# EAGLE board SparkFun GPS NEO_M9N_ANT-Panel (EAGLE 9.5.1), part 1 of 3
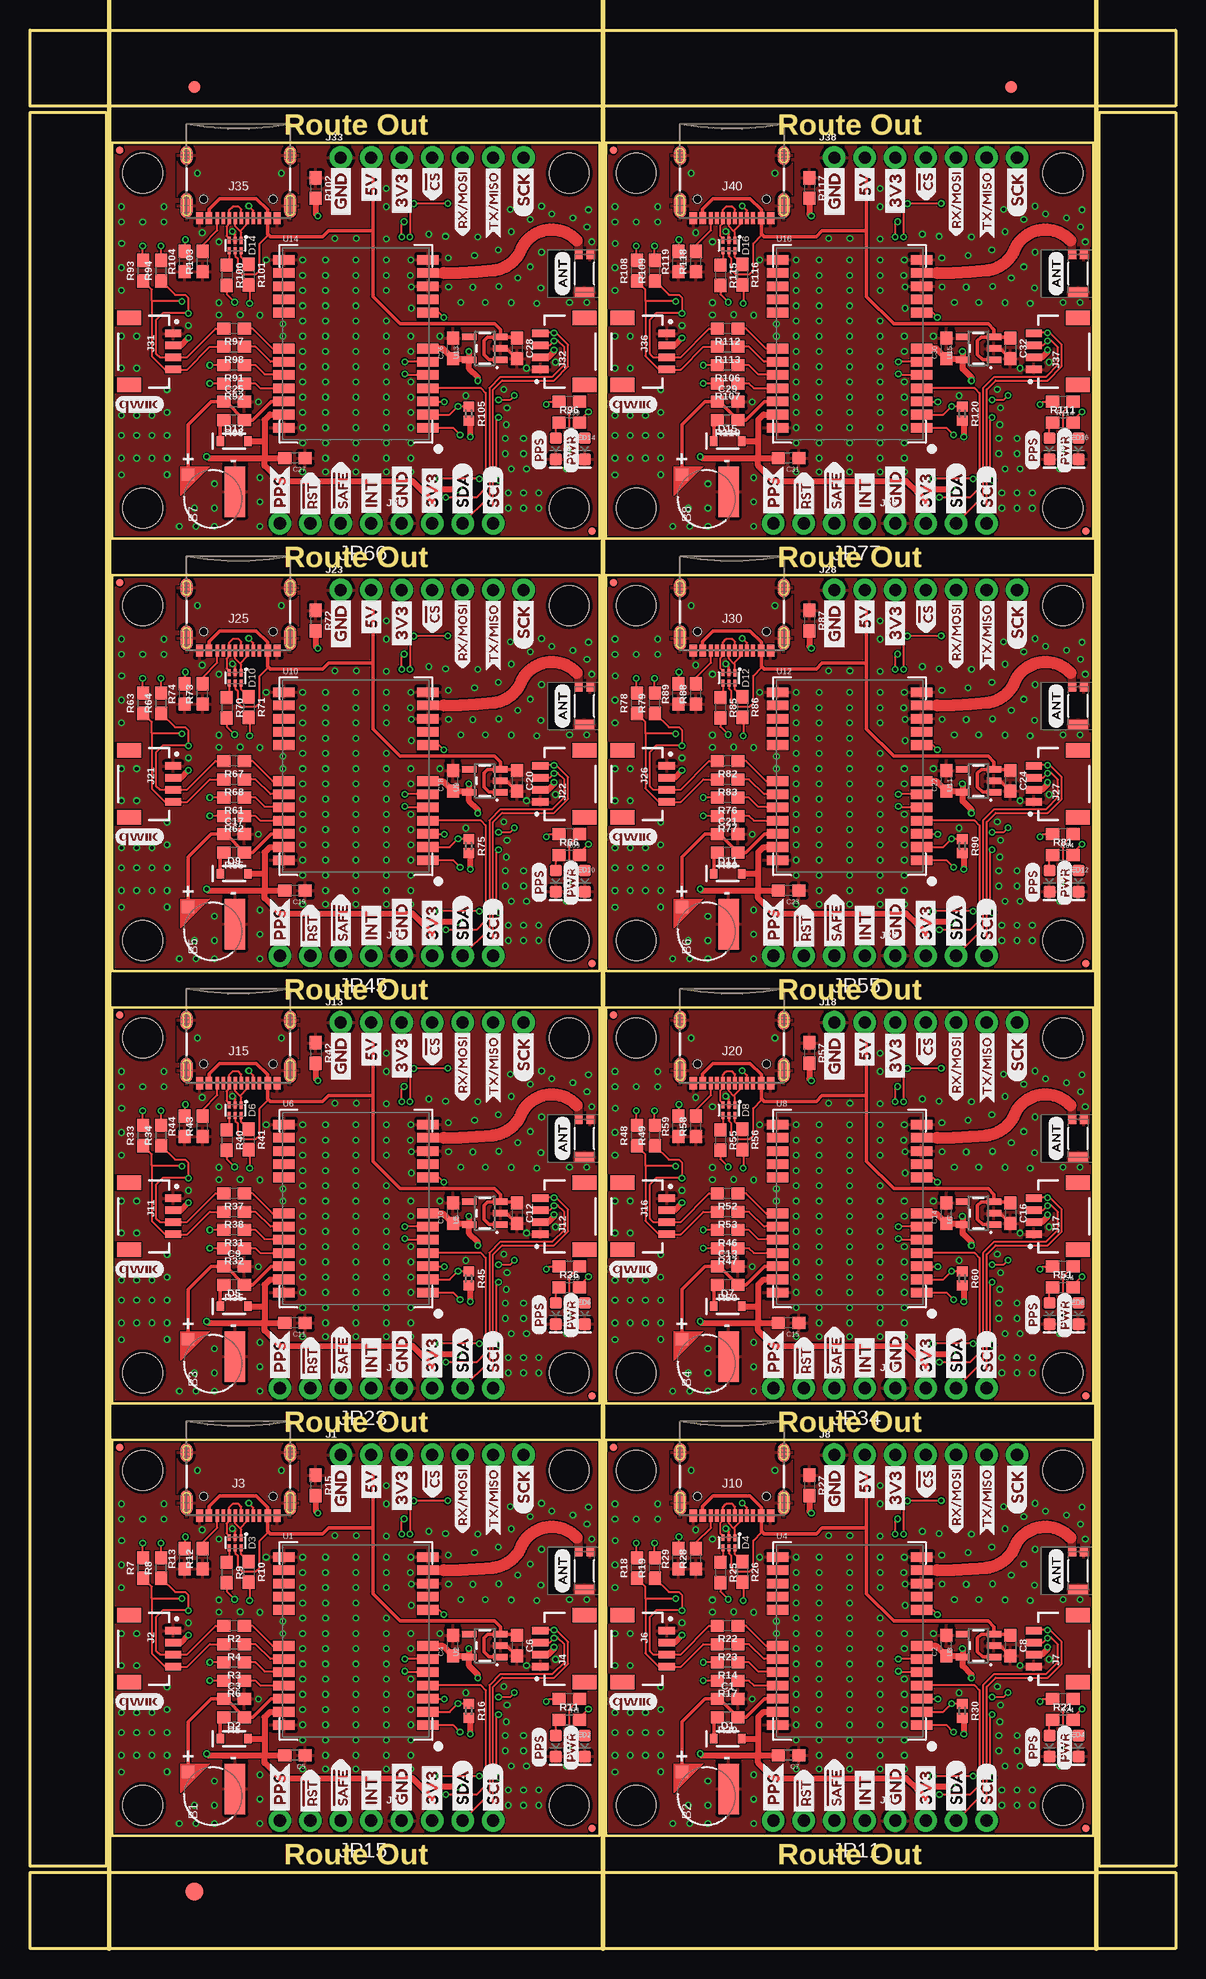
[diagram p0: board, top side]
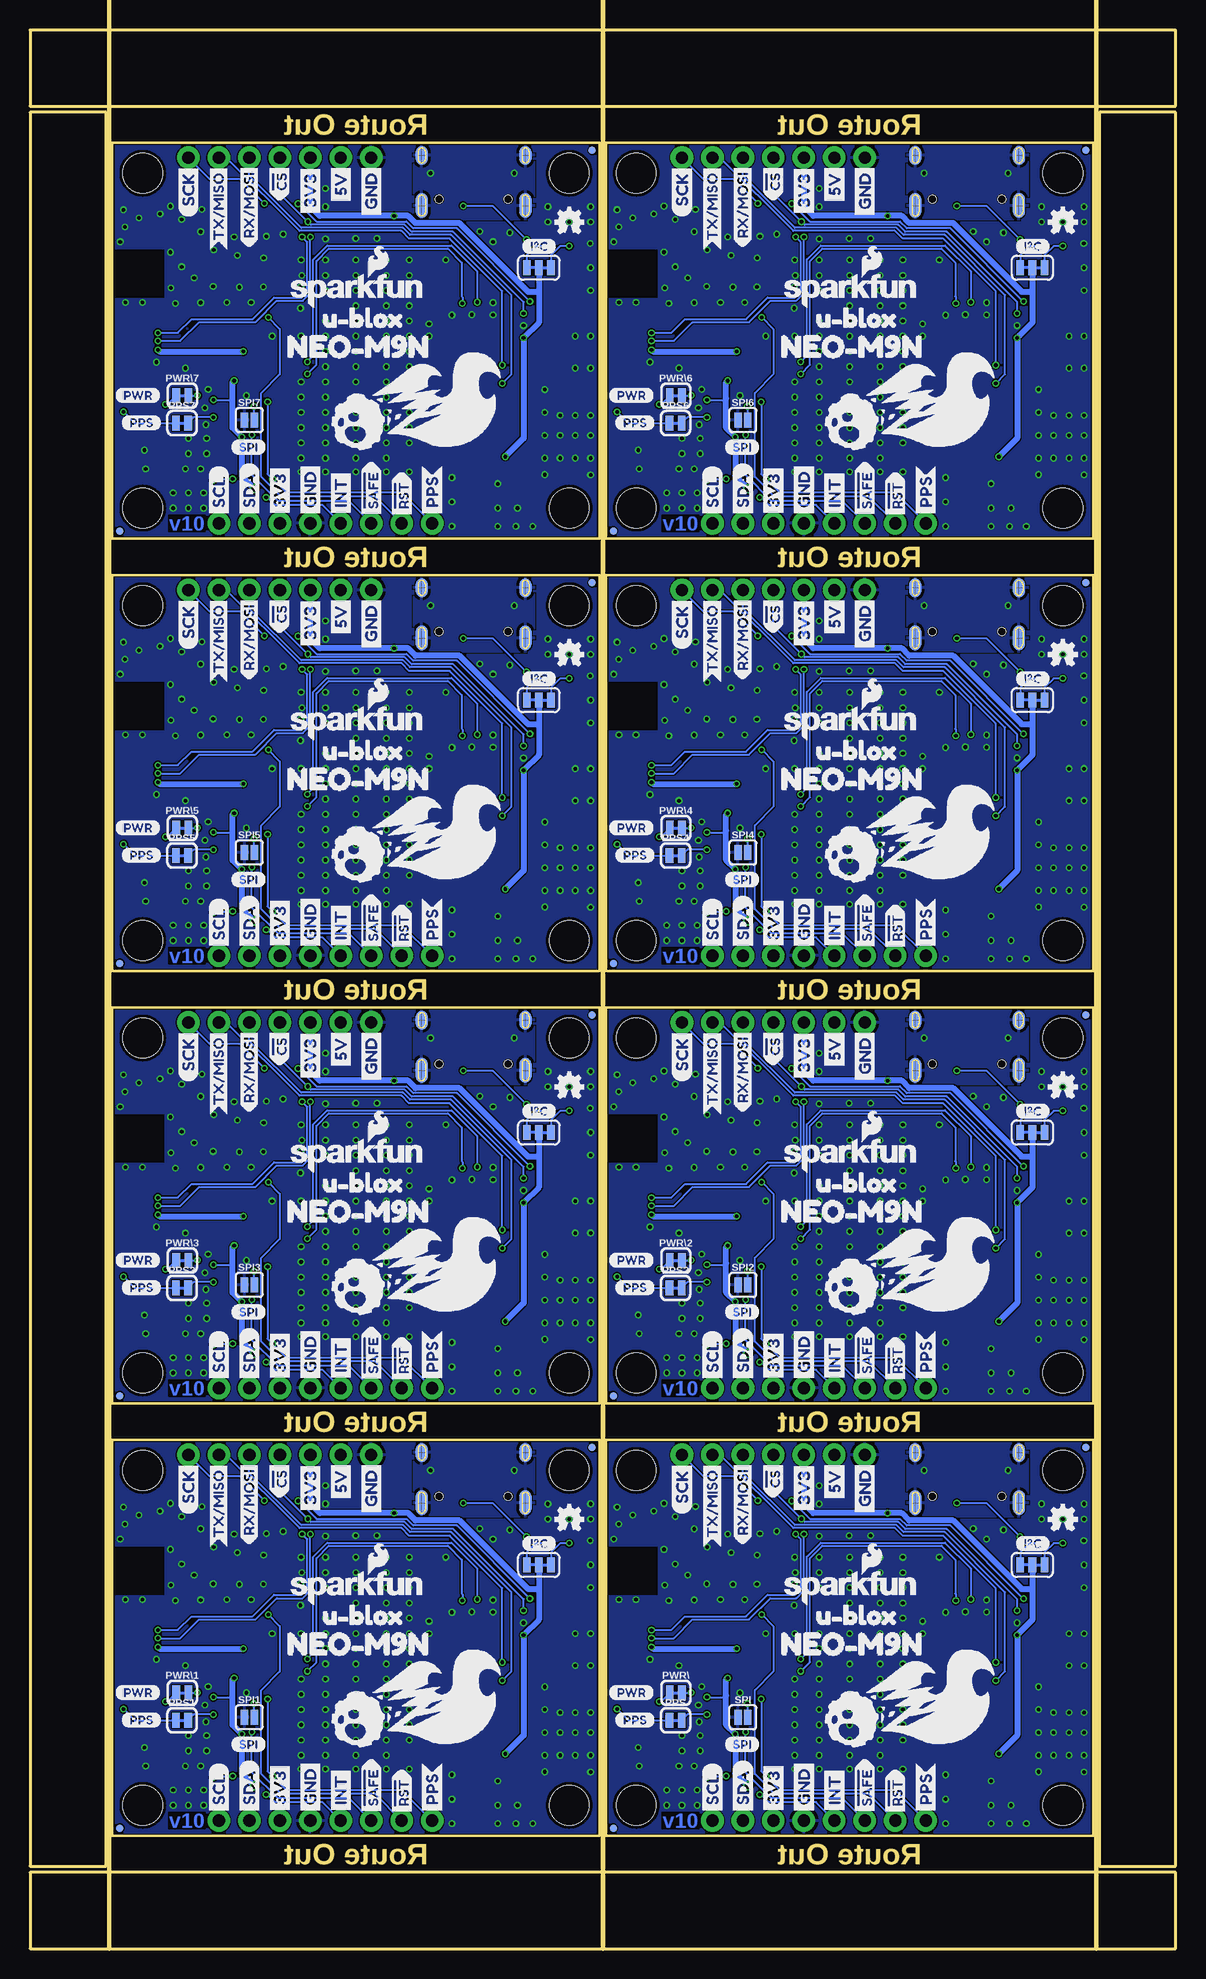
[diagram p1: board, bottom side, seen from below]

Size 95.5 x 159.92 mm. Coordinates in mm from the lower left corner, seen from the top.
Outline: 6.86,9.4 6.86,42.39 47.5,42.39 47.5,9.4 6.86,9.4
Outline: 48.01,9.4 48.01,42.39 88.65,42.39 88.65,9.4 48.01,9.4
Outline: 6.86,45.44 6.86,78.44 47.5,78.44 47.5,45.44 6.86,45.44
Outline: 48.01,45.44 48.01,78.44 88.65,78.44 88.65,45.44 48.01,45.44
Outline: 6.86,81.48 6.86,114.48 47.5,114.48 47.5,81.48 6.86,81.48
Outline: 48.01,81.48 48.01,114.48 88.65,114.48 88.65,81.48 48.01,81.48
Outline: 6.86,117.53 6.86,150.52 47.5,150.52 47.5,117.53 6.86,117.53
Outline: 48.01,117.53 48.01,150.52 88.65,150.52 88.65,117.53 48.01,117.53
Outline: 0,6.35 95.5,6.35 95.5,0 0,0 0,6.35
Outline: 89.15,153.06 95.5,153.06 95.5,6.86 89.15,6.86 89.15,153.06
Outline: 0,159.92 95.5,159.92 95.5,153.57 0,153.57 0,159.92
Outline: 0,153.06 6.35,153.06 6.35,6.86 0,6.86 0,153.06
Copper layers (1*16): Top 0.035mm / dielectric 1.5mm / Bottom 0.035mm
Design rules "SparkFun-2-layer-FAB-LIMIT": minimum track width 4mil, minimum drill 6mil, track to track 4mil, track to pad 4mil, pad to pad 4mil, via to via 4mil, smd to smd 4mil, copper to edge 4mil, drill to drill 4mil, minimum pad ring 5mil, minimum via ring 5mil, stop-mask expansion 4mil, vias tented up to drill 25mil, thermal gap 10mil
Net classes: 2 3.3V: width 0.508 mm; 3 Antenna: width 1 mm, clearance 0.3 mm
Milling: 3 lines

## Footprints (pad centres in the part's own frame; a part is rotated, then mirrored left to right if it is on the bottom)
ML414H_IV01E = smd 1 x 1: + 2.022,2.032 | smd 4.2 x 1.7: - 0.6,-1.85
0603 = smd 1.1 x 1: 1 -0.85,0; 2 0.85,0
SOD-323 = smd 0.63 x 0.83: A 1.15,0; C -1.15,0
SOT886 = smd 0.61 x 0.25: 1 -0.405,0.5 | smd 0.56 x 0.25: 2 -0.43,0; 3 -0.43,-0.5; 4 0.43,-0.5; 5 0.43,0; 6 0.43,0.5
FIDUCIAL-1X2 = smd 1 x 1: 1 0,0
FIDUCIAL-1.5X3 = smd 1.5 x 1.5: 1 0,0
1X07_NO_SILK = drill 1.016 pad 1.88: 1 0,0; 2 2.54,0; 3 5.08,0; 4 7.62,0; 5 10.16,0; 6 12.7,0; 7 15.24,0
JST04_1MM_RA = smd 0.6 x 1.35: 1 -1.5,0; 2 -0.5,0; 3 0.5,0; 4 1.5,0 | smd 1.2 x 2: NC1 2.8,-3.675; NC2 -2.8,-3.675
USB-C-16P = smd 0.3 x 1.016: A5 -1.25,0.154; A6 -0.25,0.154; A7 0.25,0.154; A8 1.25,0.154; B5 1.75,0.154; B6 0.75,0.154; B7 -0.75,0.154; B8 -1.75,0.154 | smd 0.6 x 1.016: GND -3.225,0.154; GND2 3.225,0.154 | smd 1 x 2.1: SHLD1 -4.32,-0.915; SHLD2 4.32,-0.915 | smd 1 x 2.1 bottom: SHLD3 -4.32,-0.915; SHLD4 4.32,-0.915 | smd 1 x 1.6: SHLD5 -4.32,-5.095; SHLD8 4.32,-5.095 | smd 1 x 1.6 bottom: SHLD6 -4.32,-5.095; SHLD7 4.32,-5.095 | smd 0.55 x 1.016: VBUS1 -2.45,0.154; VBUS2 2.45,0.154 | hole 0.65: -2.89,-1.445; 2.89,-1.445
1X04_NO_SILK = drill 1.016 pad 1.88: 1 0,0; 2 2.54,0; 3 5.08,0; 4 7.62,0
STAND-OFF = hole 3.302: 0,0
MICRO-FIDUCIAL = smd 0.635 x 0.635: 1 0,0
SMT-JUMPER_3_2-NC_TRACE_SILK = smd 0.635 x 1.27: 1 -1.016,0; 2 0,0; 3 1.016,0
LED-0603 = smd 1 x 1: A -0.877,0; C 0.877,0
SMT-JUMPER_2_NC_TRACE_SILK = smd 0.635 x 1.27: 1 -0.508,0; 2 0.508,0
0402 = smd 0.85 x 0.9: 1 -0.58,0; 2 0.58,0
SMT-JUMPER_2_NO_SILK = smd 0.635 x 1.27: 1 -0.406,0; 2 0.406,0
NEO-M9N = smd 1.8 x 0.8: 1 6,-7; 2 6,-5.9; 3 6,-4.8; 4 6,-3.7; 5 6,-2.6; 6 6,-1.5; 7 6,-0.4; 8 6,2.6; 9 6,3.7; 10 6,4.8; 11 6,5.9; 12 6,7; 13 -6,7; 14 -6,5.9; 15 -6,4.8; 16 -6,3.7; 17 -6,2.6; 18 -6,-0.4; 19 -6,-1.5; 20 -6,-2.6; 21 -6,-3.7; 22 -6,-4.8; 23 -6,-5.9; 24 -6,-7
SOT23-5 = smd 0.55 x 1.2: 1 -0.95,-1.3; 2 0,-1.3; 3 0.95,-1.3; 4 0.95,1.3; 5 -0.95,1.3
W3011 = smd 0.8 x 0.65: 1 1.6,0.475; 2 1.6,-0.475 | smd 0.8 x 1.6: 3 -1.6,0

## Placement (x,y rotation side)
B1  6.8MM_COIN_CELL  [ML414H_IV01E]  15.24,12.7 90 top
B2  6.8MM_COIN_CELL  [ML414H_IV01E]  56.39,12.7 90 top
B3  6.8MM_COIN_CELL  [ML414H_IV01E]  15.24,48.74 90 top
B4  6.8MM_COIN_CELL  [ML414H_IV01E]  56.39,48.74 90 top
B5  6.8MM_COIN_CELL  [ML414H_IV01E]  15.24,84.79 90 top
B6  6.8MM_COIN_CELL  [ML414H_IV01E]  56.39,84.79 90 top
B7  6.8MM_COIN_CELL  [ML414H_IV01E]  15.24,120.83 90 top
B8  6.8MM_COIN_CELL  [ML414H_IV01E]  56.39,120.83 90 top
C1  1.0uF  [0603]  58.17,20.8 0 top
C2  1.0uF  [0603]  76.4,25.25 90 top
C3  1.0uF  [0603]  17.02,20.8 0 top
C4  1.0uF  [0603]  35.26,25.25 90 top
C5  0.1uF  [0603]  22.1,16.1 180 top
C6  1.0uF  [0603]  40.59,25.25 270 top
C7  0.1uF  [0603]  63.25,16.1 180 top
C8  1.0uF  [0603]  81.74,25.25 270 top
C9  1.0uF  [0603]  17.02,56.85 0 top
C10  1.0uF  [0603]  35.26,61.29 90 top
C11  0.1uF  [0603]  22.1,52.15 180 top
C12  1.0uF  [0603]  40.59,61.29 270 top
C13  1.0uF  [0603]  58.17,56.85 0 top
C14  1.0uF  [0603]  76.4,61.29 90 top
C15  0.1uF  [0603]  63.25,52.15 180 top
C16  1.0uF  [0603]  81.74,61.29 270 top
C17  1.0uF  [0603]  17.02,92.89 0 top
C18  1.0uF  [0603]  35.26,97.33 90 top
C19  0.1uF  [0603]  22.1,88.19 180 top
C20  1.0uF  [0603]  40.59,97.33 270 top
C21  1.0uF  [0603]  58.17,92.89 0 top
C22  1.0uF  [0603]  76.4,97.33 90 top
C23  0.1uF  [0603]  63.25,88.19 180 top
C24  1.0uF  [0603]  81.74,97.33 270 top
C25  1.0uF  [0603]  17.02,128.93 0 top
C26  1.0uF  [0603]  35.26,133.38 90 top
C27  0.1uF  [0603]  22.1,124.23 180 top
C28  1.0uF  [0603]  40.59,133.38 270 top
C29  1.0uF  [0603]  58.17,128.93 0 top
C30  1.0uF  [0603]  76.4,133.38 90 top
C31  0.1uF  [0603]  63.25,124.23 180 top
C32  1.0uF  [0603]  81.74,133.38 270 top
D1  0.5A/40V/420mV  [SOD-323]  58.17,17.5 0 top
D2  0.5A/40V/420mV  [SOD-323]  17.02,17.5 0 top
D3  PRTR5V0U2F  [SOT886]  17.12,33.83 270 top
D4  PRTR5V0U2F  [SOT886]  58.27,33.83 270 top
D5  0.5A/40V/420mV  [SOD-323]  17.02,53.54 0 top
D6  PRTR5V0U2F  [SOT886]  17.12,69.88 270 top
D7  0.5A/40V/420mV  [SOD-323]  58.17,53.54 0 top
D8  PRTR5V0U2F  [SOT886]  58.27,69.88 270 top
D9  0.5A/40V/420mV  [SOD-323]  17.02,89.59 0 top
D10  PRTR5V0U2F  [SOT886]  17.12,105.92 270 top
D11  0.5A/40V/420mV  [SOD-323]  58.17,89.59 0 top
D12  PRTR5V0U2F  [SOT886]  58.27,105.92 270 top
D13  0.5A/40V/420mV  [SOD-323]  17.02,125.63 0 top
D14  PRTR5V0U2F  [SOT886]  17.12,141.96 270 top
D15  0.5A/40V/420mV  [SOD-323]  58.17,125.63 0 top
D16  PRTR5V0U2F  [SOT886]  58.27,141.96 270 top
E$1  [FIDUCIAL-1X2]  13.72,155.16 0 top
E$2  [FIDUCIAL-1X2]  81.79,155.16 0 top
E$3  [FIDUCIAL-1.5X3]  13.72,4.76 0 top
J1  [1X07_NO_SILK]  25.91,41.15 0 top
J2  Qwiic Right Angle  [JST04_1MM_RA]  11.94,24.99 270 top
J3  [USB-C-16P]  17.37,36.25 180 top
J4  Qwiic Right Angle  [JST04_1MM_RA]  42.54,24.99 90 top
J5  [1X04_NO_SILK]  30.99,10.67 0 top
J6  Qwiic Right Angle  [JST04_1MM_RA]  53.09,24.99 270 top
J7  Qwiic Right Angle  [JST04_1MM_RA]  83.69,24.99 90 top
J8  [1X07_NO_SILK]  67.06,41.15 0 top
J9  [1X04_NO_SILK]  72.14,10.67 0 top
J10  [USB-C-16P]  58.52,36.25 180 top
J11  Qwiic Right Angle  [JST04_1MM_RA]  11.94,61.04 270 top
J12  Qwiic Right Angle  [JST04_1MM_RA]  42.54,61.04 90 top
J13  [1X07_NO_SILK]  25.91,77.19 0 top
J14  [1X04_NO_SILK]  30.99,46.71 0 top
J15  [USB-C-16P]  17.37,72.29 180 top
J16  Qwiic Right Angle  [JST04_1MM_RA]  53.09,61.04 270 top
J17  Qwiic Right Angle  [JST04_1MM_RA]  83.69,61.04 90 top
J18  [1X07_NO_SILK]  67.06,77.19 0 top
J19  [1X04_NO_SILK]  72.14,46.71 0 top
J20  [USB-C-16P]  58.52,72.29 180 top
J21  Qwiic Right Angle  [JST04_1MM_RA]  11.94,97.08 270 top
J22  Qwiic Right Angle  [JST04_1MM_RA]  42.54,97.08 90 top
J23  [1X07_NO_SILK]  25.91,113.23 0 top
J24  [1X04_NO_SILK]  30.99,82.75 0 top
J25  [USB-C-16P]  17.37,108.33 180 top
J26  Qwiic Right Angle  [JST04_1MM_RA]  53.09,97.08 270 top
J27  Qwiic Right Angle  [JST04_1MM_RA]  83.69,97.08 90 top
J28  [1X07_NO_SILK]  67.06,113.23 0 top
J29  [1X04_NO_SILK]  72.14,82.75 0 top
J30  [USB-C-16P]  58.52,108.33 180 top
J31  Qwiic Right Angle  [JST04_1MM_RA]  11.94,133.12 270 top
J32  Qwiic Right Angle  [JST04_1MM_RA]  42.54,133.12 90 top
J33  [1X07_NO_SILK]  25.91,149.28 0 top
J34  [1X04_NO_SILK]  30.99,118.8 0 top
J35  [USB-C-16P]  17.37,144.37 180 top
J36  Qwiic Right Angle  [JST04_1MM_RA]  53.09,133.12 270 top
J37  Qwiic Right Angle  [JST04_1MM_RA]  83.69,133.12 90 top
J38  [1X07_NO_SILK]  67.06,149.28 0 top
J39  [1X04_NO_SILK]  72.14,118.8 0 top
J40  [USB-C-16P]  58.52,144.37 180 top
JP1  STAND-OFF  [STAND-OFF]  50.55,39.85 0 top
JP2  STAND-OFF  [STAND-OFF]  86.11,39.85 0 top
JP3  FIDUCIALUFIDUCIAL  [MICRO-FIDUCIAL]  88.01,10.03 0 top
JP4  FIDUCIALUFIDUCIAL  [MICRO-FIDUCIAL]  48.64,41.76 0 top
JP5  JUMPER-SMT_3_2-NC_TRACE_SILK  [SMT-JUMPER_3_2-NC_TRACE_SILK]  11.94,31.98 0 bottom
JP6  JUMPER-SMT_3_2-NC_TRACE_SILK  [SMT-JUMPER_3_2-NC_TRACE_SILK]  53.09,31.98 0 bottom
JP7  FIDUCIALUFIDUCIAL  [MICRO-FIDUCIAL]  88.01,10.03 0 bottom
JP8  FIDUCIALUFIDUCIAL  [MICRO-FIDUCIAL]  48.64,41.76 0 bottom
JP9  STAND-OFF  [STAND-OFF]  50.55,11.94 0 top
JP10  STAND-OFF  [STAND-OFF]  86.11,11.94 0 top
JP11  [1X04_NO_SILK]  69.6,10.67 180 top
JP12  STAND-OFF  [STAND-OFF]  9.4,75.9 0 top
JP13  STAND-OFF  [STAND-OFF]  44.96,75.9 0 top
JP14  FIDUCIALUFIDUCIAL  [MICRO-FIDUCIAL]  46.86,46.08 0 top
JP15  [1X04_NO_SILK]  28.45,10.67 180 top
JP16  FIDUCIALUFIDUCIAL  [MICRO-FIDUCIAL]  7.49,77.8 0 top
JP17  JUMPER-SMT_3_2-NC_TRACE_SILK  [SMT-JUMPER_3_2-NC_TRACE_SILK]  11.94,68.02 0 bottom
JP18  FIDUCIALUFIDUCIAL  [MICRO-FIDUCIAL]  46.86,46.08 0 bottom
JP19  FIDUCIALUFIDUCIAL  [MICRO-FIDUCIAL]  7.49,77.8 0 bottom
JP20  STAND-OFF  [STAND-OFF]  9.4,47.98 0 top
JP21  FIDUCIALUFIDUCIAL  [MICRO-FIDUCIAL]  46.86,10.03 0 top
JP22  STAND-OFF  [STAND-OFF]  44.96,47.98 0 top
JP23  [1X04_NO_SILK]  28.45,46.71 180 top
JP24  STAND-OFF  [STAND-OFF]  50.55,75.9 0 top
JP25  STAND-OFF  [STAND-OFF]  86.11,75.9 0 top
JP26  FIDUCIALUFIDUCIAL  [MICRO-FIDUCIAL]  88.01,46.08 0 top
JP27  FIDUCIALUFIDUCIAL  [MICRO-FIDUCIAL]  48.64,77.8 0 top
JP28  JUMPER-SMT_3_2-NC_TRACE_SILK  [SMT-JUMPER_3_2-NC_TRACE_SILK]  53.09,68.02 0 bottom
JP29  FIDUCIALUFIDUCIAL  [MICRO-FIDUCIAL]  88.01,46.08 0 bottom
JP30  FIDUCIALUFIDUCIAL  [MICRO-FIDUCIAL]  48.64,77.8 0 bottom
JP31  STAND-OFF  [STAND-OFF]  9.4,39.85 0 top
JP32  STAND-OFF  [STAND-OFF]  50.55,47.98 0 top
JP33  STAND-OFF  [STAND-OFF]  86.11,47.98 0 top
JP34  [1X04_NO_SILK]  69.6,46.71 180 top
JP35  STAND-OFF  [STAND-OFF]  9.4,111.94 0 top
JP36  STAND-OFF  [STAND-OFF]  44.96,111.94 0 top
JP37  FIDUCIALUFIDUCIAL  [MICRO-FIDUCIAL]  46.86,82.12 0 top
JP38  FIDUCIALUFIDUCIAL  [MICRO-FIDUCIAL]  7.49,113.84 0 top
JP39  JUMPER-SMT_3_2-NC_TRACE_SILK  [SMT-JUMPER_3_2-NC_TRACE_SILK]  11.94,104.06 0 bottom
JP40  FIDUCIALUFIDUCIAL  [MICRO-FIDUCIAL]  46.86,82.12 0 bottom
JP41  STAND-OFF  [STAND-OFF]  44.96,39.85 0 top
JP42  FIDUCIALUFIDUCIAL  [MICRO-FIDUCIAL]  7.49,113.84 0 bottom
JP43  STAND-OFF  [STAND-OFF]  9.4,84.02 0 top
JP44  STAND-OFF  [STAND-OFF]  44.96,84.02 0 top
JP45  [1X04_NO_SILK]  28.45,82.75 180 top
JP46  STAND-OFF  [STAND-OFF]  50.55,111.94 0 top
JP47  STAND-OFF  [STAND-OFF]  86.11,111.94 0 top
JP48  FIDUCIALUFIDUCIAL  [MICRO-FIDUCIAL]  88.01,82.12 0 top
JP49  FIDUCIALUFIDUCIAL  [MICRO-FIDUCIAL]  48.64,113.84 0 top
JP50  JUMPER-SMT_3_2-NC_TRACE_SILK  [SMT-JUMPER_3_2-NC_TRACE_SILK]  53.09,104.06 0 bottom
JP51  FIDUCIALUFIDUCIAL  [MICRO-FIDUCIAL]  88.01,82.12 0 bottom
JP52  FIDUCIALUFIDUCIAL  [MICRO-FIDUCIAL]  48.64,113.84 0 bottom
JP53  STAND-OFF  [STAND-OFF]  50.55,84.02 0 top
JP54  STAND-OFF  [STAND-OFF]  86.11,84.02 0 top
JP55  [1X04_NO_SILK]  69.6,82.75 180 top
JP56  STAND-OFF  [STAND-OFF]  9.4,147.98 0 top
JP57  STAND-OFF  [STAND-OFF]  44.96,147.98 0 top
JP58  FIDUCIALUFIDUCIAL  [MICRO-FIDUCIAL]  46.86,118.16 0 top
JP59  FIDUCIALUFIDUCIAL  [MICRO-FIDUCIAL]  7.49,149.89 0 top
JP60  JUMPER-SMT_3_2-NC_TRACE_SILK  [SMT-JUMPER_3_2-NC_TRACE_SILK]  11.94,140.11 0 bottom
JP61  FIDUCIALUFIDUCIAL  [MICRO-FIDUCIAL]  7.49,41.76 0 top
JP62  FIDUCIALUFIDUCIAL  [MICRO-FIDUCIAL]  46.86,118.16 0 bottom
JP63  FIDUCIALUFIDUCIAL  [MICRO-FIDUCIAL]  7.49,149.89 0 bottom
JP64  STAND-OFF  [STAND-OFF]  9.4,120.07 0 top
JP65  STAND-OFF  [STAND-OFF]  44.96,120.07 0 top
JP66  [1X04_NO_SILK]  28.45,118.8 180 top
JP67  STAND-OFF  [STAND-OFF]  50.55,147.98 0 top
JP68  STAND-OFF  [STAND-OFF]  86.11,147.98 0 top
JP69  FIDUCIALUFIDUCIAL  [MICRO-FIDUCIAL]  88.01,118.16 0 top
JP70  FIDUCIALUFIDUCIAL  [MICRO-FIDUCIAL]  48.64,149.89 0 top
JP71  FIDUCIALUFIDUCIAL  [MICRO-FIDUCIAL]  46.86,10.03 0 bottom
JP72  JUMPER-SMT_3_2-NC_TRACE_SILK  [SMT-JUMPER_3_2-NC_TRACE_SILK]  53.09,140.11 0 bottom
JP73  FIDUCIALUFIDUCIAL  [MICRO-FIDUCIAL]  88.01,118.16 0 bottom
JP74  FIDUCIALUFIDUCIAL  [MICRO-FIDUCIAL]  48.64,149.89 0 bottom
JP75  STAND-OFF  [STAND-OFF]  50.55,120.07 0 top
JP76  STAND-OFF  [STAND-OFF]  86.11,120.07 0 top
JP77  [1X04_NO_SILK]  69.6,118.8 180 top
JP81  FIDUCIALUFIDUCIAL  [MICRO-FIDUCIAL]  7.49,41.76 0 bottom
JP91  STAND-OFF  [STAND-OFF]  9.4,11.94 0 top
JP101  STAND-OFF  [STAND-OFF]  44.96,11.94 0 top
LED1  BLUE  [LED-0603]  43.84,16.89 270 top
LED2  RED  [LED-0603]  46.25,16.89 270 top
LED3  BLUE  [LED-0603]  84.99,16.89 270 top
LED4  RED  [LED-0603]  87.4,16.89 270 top
LED5  BLUE  [LED-0603]  43.84,52.93 270 top
LED6  RED  [LED-0603]  46.25,52.93 270 top
LED7  BLUE  [LED-0603]  84.99,52.93 270 top
LED8  RED  [LED-0603]  87.4,52.93 270 top
LED9  BLUE  [LED-0603]  43.84,88.98 270 top
LED10  RED  [LED-0603]  46.25,88.98 270 top
LED11  BLUE  [LED-0603]  84.99,88.98 270 top
LED12  RED  [LED-0603]  87.4,88.98 270 top
LED13  BLUE  [LED-0603]  43.84,125.02 270 top
LED14  RED  [LED-0603]  46.25,125.02 270 top
LED15  BLUE  [LED-0603]  84.99,125.02 270 top
LED16  RED  [LED-0603]  87.4,125.02 270 top
LOGO1  OSHW-LOGOMINI  [OSHW-LOGO-MINI]  9.4,35.79 0 bottom
LOGO2  SFE_LOGO_NAME_FLAME.1_INCH  [SFE_LOGO_NAME_FLAME_.1]  27.05,30.07 0 bottom
LOGO3  OSHW-LOGOMINI  [OSHW-LOGO-MINI]  50.55,35.79 0 bottom
LOGO4  SFE_LOGO_NAME_FLAME.1_INCH  [SFE_LOGO_NAME_FLAME_.1]  68.2,30.07 0 bottom
LOGO5  OSHW-LOGOMINI  [OSHW-LOGO-MINI]  9.4,71.83 0 bottom
LOGO6  SFE_LOGO_NAME_FLAME.1_INCH  [SFE_LOGO_NAME_FLAME_.1]  27.05,66.12 0 bottom
LOGO7  OSHW-LOGOMINI  [OSHW-LOGO-MINI]  50.55,71.83 0 bottom
LOGO8  SFE_LOGO_NAME_FLAME.1_INCH  [SFE_LOGO_NAME_FLAME_.1]  68.2,66.12 0 bottom
LOGO9  OSHW-LOGOMINI  [OSHW-LOGO-MINI]  9.4,107.87 0 bottom
LOGO10  SFE_LOGO_NAME_FLAME.1_INCH  [SFE_LOGO_NAME_FLAME_.1]  27.05,102.16 0 bottom
LOGO11  OSHW-LOGOMINI  [OSHW-LOGO-MINI]  50.55,107.87 0 bottom
LOGO12  SFE_LOGO_NAME_FLAME.1_INCH  [SFE_LOGO_NAME_FLAME_.1]  68.2,102.16 0 bottom
LOGO13  OSHW-LOGOMINI  [OSHW-LOGO-MINI]  9.4,143.92 0 bottom
LOGO14  SFE_LOGO_NAME_FLAME.1_INCH  [SFE_LOGO_NAME_FLAME_.1]  27.05,138.2 0 bottom
LOGO15  OSHW-LOGOMINI  [OSHW-LOGO-MINI]  50.55,143.92 0 bottom
LOGO16  SFE_LOGO_NAME_FLAME.1_INCH  [SFE_LOGO_NAME_FLAME_.1]  68.2,138.2 0 bottom
PPS  JUMPER-SMT_2_NC_TRACE_SILK  [SMT-JUMPER_2_NC_TRACE_SILK]  41.68,19.02 0 bottom
PPS1  JUMPER-SMT_2_NC_TRACE_SILK  [SMT-JUMPER_2_NC_TRACE_SILK]  82.83,19.02 0 bottom
PPS2  JUMPER-SMT_2_NC_TRACE_SILK  [SMT-JUMPER_2_NC_TRACE_SILK]  41.68,55.07 0 bottom
PPS3  JUMPER-SMT_2_NC_TRACE_SILK  [SMT-JUMPER_2_NC_TRACE_SILK]  82.83,55.07 0 bottom
PPS4  JUMPER-SMT_2_NC_TRACE_SILK  [SMT-JUMPER_2_NC_TRACE_SILK]  41.68,91.11 0 bottom
PPS5  JUMPER-SMT_2_NC_TRACE_SILK  [SMT-JUMPER_2_NC_TRACE_SILK]  82.83,91.11 0 bottom
PPS6  JUMPER-SMT_2_NC_TRACE_SILK  [SMT-JUMPER_2_NC_TRACE_SILK]  41.68,127.15 0 bottom
PPS7  JUMPER-SMT_2_NC_TRACE_SILK  [SMT-JUMPER_2_NC_TRACE_SILK]  82.83,127.15 0 bottom
PWR\  JUMPER-SMT_2_NC_TRACE_SILK  [SMT-JUMPER_2_NC_TRACE_SILK]  41.66,21.31 0 bottom
PWR\1  JUMPER-SMT_2_NC_TRACE_SILK  [SMT-JUMPER_2_NC_TRACE_SILK]  82.8,21.31 0 bottom
PWR\2  JUMPER-SMT_2_NC_TRACE_SILK  [SMT-JUMPER_2_NC_TRACE_SILK]  41.66,57.35 0 bottom
PWR\3  JUMPER-SMT_2_NC_TRACE_SILK  [SMT-JUMPER_2_NC_TRACE_SILK]  82.8,57.35 0 bottom
PWR\4  JUMPER-SMT_2_NC_TRACE_SILK  [SMT-JUMPER_2_NC_TRACE_SILK]  41.66,93.4 0 bottom
PWR\5  JUMPER-SMT_2_NC_TRACE_SILK  [SMT-JUMPER_2_NC_TRACE_SILK]  82.8,93.4 0 bottom
PWR\6  JUMPER-SMT_2_NC_TRACE_SILK  [SMT-JUMPER_2_NC_TRACE_SILK]  41.66,129.44 0 bottom
PWR\7  JUMPER-SMT_2_NC_TRACE_SILK  [SMT-JUMPER_2_NC_TRACE_SILK]  82.8,129.44 0 bottom
R1  1k  [0603]  44.96,20.8 180 top
R2  33  [0603]  17.02,26.9 180 top
R3  33  [0603]  17.02,23.85 180 top
R4  33  [0603]  17.02,25.37 180 top
R5  1k  [0603]  17.02,19.28 180 top
R6  33  [0603]  17.02,22.33 180 top
R7  2.2k  [0603]  9.45,31.72 90 top
R8  2.2k  [0603]  10.95,31.72 90 top
R9  27  [0603]  16.41,31.34 270 top
R10  27  [0603]  18.24,31.39 270 top
R11  1k  [0603]  44.96,19.05 0 top
R12  5.1k  [0603]  14.38,32.49 90 top
R13  5.1k  [0603]  12.9,32.49 90 top
R14  33  [0603]  58.17,23.85 180 top
R15  100k  [0603]  23.83,38.61 270 top
R16  10k  [0402]  36.58,19.81 270 top
R17  33  [0603]  58.17,22.33 180 top
R18  2.2k  [0603]  50.6,31.72 90 top
R19  2.2k  [0603]  52.1,31.72 90 top
R20  1k  [0603]  58.17,19.28 180 top
R21  1k  [0603]  86.11,19.05 0 top
R22  33  [0603]  58.17,26.9 180 top
R23  33  [0603]  58.17,25.37 180 top
R24  1k  [0603]  86.11,20.8 180 top
R25  27  [0603]  57.56,31.34 270 top
R26  27  [0603]  59.39,31.39 270 top
R27  100k  [0603]  64.97,38.61 270 top
R28  5.1k  [0603]  55.52,32.49 90 top
R29  5.1k  [0603]  54.05,32.49 90 top
R30  10k  [0402]  77.72,19.81 270 top
R31  33  [0603]  17.02,59.89 180 top
R32  33  [0603]  17.02,58.37 180 top
R33  2.2k  [0603]  9.45,67.77 90 top
R34  2.2k  [0603]  10.95,67.77 90 top
R35  1k  [0603]  17.02,55.32 180 top
R36  1k  [0603]  44.96,55.09 0 top
R37  33  [0603]  17.02,62.94 180 top
R38  33  [0603]  17.02,61.42 180 top
R39  1k  [0603]  44.96,56.85 180 top
R40  27  [0603]  16.41,67.39 270 top
R41  27  [0603]  18.24,67.44 270 top
R42  100k  [0603]  23.83,74.65 270 top
R43  5.1k  [0603]  14.38,68.53 90 top
R44  5.1k  [0603]  12.9,68.53 90 top
R45  10k  [0402]  36.58,55.85 270 top
R46  33  [0603]  58.17,59.89 180 top
R47  33  [0603]  58.17,58.37 180 top
R48  2.2k  [0603]  50.6,67.77 90 top
R49  2.2k  [0603]  52.1,67.77 90 top
R50  1k  [0603]  58.17,55.32 180 top
R51  1k  [0603]  86.11,55.09 0 top
R52  33  [0603]  58.17,62.94 180 top
R53  33  [0603]  58.17,61.42 180 top
R54  1k  [0603]  86.11,56.85 180 top
R55  27  [0603]  57.56,67.39 270 top
R56  27  [0603]  59.39,67.44 270 top
R57  100k  [0603]  64.97,74.65 270 top
R58  5.1k  [0603]  55.52,68.53 90 top
R59  5.1k  [0603]  54.05,68.53 90 top
R60  10k  [0402]  77.72,55.85 270 top
R61  33  [0603]  17.02,95.94 180 top
R62  33  [0603]  17.02,94.41 180 top
R63  2.2k  [0603]  9.45,103.81 90 top
R64  2.2k  [0603]  10.95,103.81 90 top
R65  1k  [0603]  17.02,91.36 180 top
R66  1k  [0603]  44.96,91.14 0 top
R67  33  [0603]  17.02,98.98 180 top
R68  33  [0603]  17.02,97.46 180 top
R69  1k  [0603]  44.96,92.89 180 top
R70  27  [0603]  16.41,103.43 270 top
R71  27  [0603]  18.24,103.48 270 top
R72  100k  [0603]  23.83,110.69 270 top
R73  5.1k  [0603]  14.38,104.57 90 top
R74  5.1k  [0603]  12.9,104.57 90 top
R75  10k  [0402]  36.58,91.9 270 top
R76  33  [0603]  58.17,95.94 180 top
R77  33  [0603]  58.17,94.41 180 top
R78  2.2k  [0603]  50.6,103.81 90 top
R79  2.2k  [0603]  52.1,103.81 90 top
R80  1k  [0603]  58.17,91.36 180 top
R81  1k  [0603]  86.11,91.14 0 top
R82  33  [0603]  58.17,98.98 180 top
R83  33  [0603]  58.17,97.46 180 top
R84  1k  [0603]  86.11,92.89 180 top
R85  27  [0603]  57.56,103.43 270 top
R86  27  [0603]  59.39,103.48 270 top
R87  100k  [0603]  64.97,110.69 270 top
R88  5.1k  [0603]  55.52,104.57 90 top
R89  5.1k  [0603]  54.05,104.57 90 top
R90  10k  [0402]  77.72,91.9 270 top
R91  33  [0603]  17.02,131.98 180 top
R92  33  [0603]  17.02,130.45 180 top
R93  2.2k  [0603]  9.45,139.85 90 top
R94  2.2k  [0603]  10.95,139.85 90 top
R95  1k  [0603]  17.02,127.41 180 top
R96  1k  [0603]  44.96,127.18 0 top
R97  33  [0603]  17.02,135.03 180 top
R98  33  [0603]  17.02,133.5 180 top
R99  1k  [0603]  44.96,128.93 180 top
R100  27  [0603]  16.41,139.47 270 top
R101  27  [0603]  18.24,139.52 270 top
R102  100k  [0603]  23.83,146.74 270 top
R103  5.1k  [0603]  14.38,140.61 90 top
R104  5.1k  [0603]  12.9,140.61 90 top
R105  10k  [0402]  36.58,127.94 270 top
R106  33  [0603]  58.17,131.98 180 top
R107  33  [0603]  58.17,130.45 180 top
R108  2.2k  [0603]  50.6,139.85 90 top
R109  2.2k  [0603]  52.1,139.85 90 top
R110  1k  [0603]  58.17,127.41 180 top
R111  1k  [0603]  86.11,127.18 0 top
R112  33  [0603]  58.17,135.03 180 top
R113  33  [0603]  58.17,133.5 180 top
R114  1k  [0603]  86.11,128.93 180 top
R115  27  [0603]  57.56,139.47 270 top
R116  27  [0603]  59.39,139.52 270 top
R117  100k  [0603]  64.97,146.74 270 top
R118  5.1k  [0603]  55.52,140.61 90 top
R119  5.1k  [0603]  54.05,140.61 90 top
R120  10k  [0402]  77.72,127.94 270 top
SPI  JUMPER-SMT_2_NO_SILK  [SMT-JUMPER_2_NO_SILK]  36.07,19.28 0 bottom
SPI1  JUMPER-SMT_2_NO_SILK  [SMT-JUMPER_2_NO_SILK]  77.22,19.28 0 bottom
SPI2  JUMPER-SMT_2_NO_SILK  [SMT-JUMPER_2_NO_SILK]  36.07,55.32 0 bottom
SPI3  JUMPER-SMT_2_NO_SILK  [SMT-JUMPER_2_NO_SILK]  77.22,55.32 0 bottom
SPI4  JUMPER-SMT_2_NO_SILK  [SMT-JUMPER_2_NO_SILK]  36.07,91.36 0 bottom
SPI5  JUMPER-SMT_2_NO_SILK  [SMT-JUMPER_2_NO_SILK]  77.22,91.36 0 bottom
SPI6  JUMPER-SMT_2_NO_SILK  [SMT-JUMPER_2_NO_SILK]  36.07,127.41 0 bottom
SPI7  JUMPER-SMT_2_NO_SILK  [SMT-JUMPER_2_NO_SILK]  77.22,127.41 0 bottom
U1  U-BLOX_NEO-M9N  [NEO-M9N]  27.18,25.63 0 top
U2  3.3V  [SOT23-5]  37.92,25.25 90 top
U3  3.3V  [SOT23-5]  79.07,25.25 90 top
U4  U-BLOX_NEO-M9N  [NEO-M9N]  68.33,25.63 0 top
U5  3.3V  [SOT23-5]  37.92,61.29 90 top
U6  U-BLOX_NEO-M9N  [NEO-M9N]  27.18,61.67 0 top
U7  3.3V  [SOT23-5]  79.07,61.29 90 top
U8  U-BLOX_NEO-M9N  [NEO-M9N]  68.33,61.67 0 top
U9  3.3V  [SOT23-5]  37.92,97.33 90 top
U10  U-BLOX_NEO-M9N  [NEO-M9N]  27.18,97.71 0 top
U11  3.3V  [SOT23-5]  79.07,97.33 90 top
U12  U-BLOX_NEO-M9N  [NEO-M9N]  68.33,97.71 0 top
U13  3.3V  [SOT23-5]  37.92,133.38 90 top
U14  U-BLOX_NEO-M9N  [NEO-M9N]  27.18,133.76 0 top
U15  3.3V  [SOT23-5]  79.07,133.38 90 top
U16  U-BLOX_NEO-M9N  [NEO-M9N]  68.33,133.76 0 top
U$1  [SDA-[)]  36.07,11.05 90 top
U$2  [NEO#M9N1]  34.54,25.4 0 bottom
U$3  [SCL-[)]  38.61,11.05 90 top
U$4  [SDA-[)]  36.07,11.05 90 bottom
U$5  [SCL-[)]  38.61,11.05 90 bottom
U$6  [3V3-04]  33.53,11.05 90 top
U$7  [3V3-04]  33.53,11.05 90 bottom
U$8  [GND-04]  30.99,11.05 90 top
U$9  [GND-04]  30.99,11.05 90 bottom
U$10  [I_SUPER2_C-()-03]  13.34,33.76 0 bottom
U$11  [SPI1]  37.59,17.02 0 bottom
U$12  [PPS0]  46.74,19.05 0 bottom
U$13  [ANT0]  44.4,29.62 90 top
U$14  [QWIIC_4MM]  9.14,20.57 0 top
U$15  [INT8]  28.45,11.05 90 top
U$16  [INT8]  28.45,11.05 90 bottom
U$17  [PWR1]  47.24,21.34 0 bottom
U$18  [PWR-()-03]  45.11,14.86 90 top
U$19  [5V]  28.45,37.06 90 top
U$20  [5V]  28.45,37.06 90 bottom
U$21  [NEO_GPS_BOARD_SILK_FINAL#03#JPG]  22.1,20.83 0 bottom
U$22  [U#BLOX3]  31.37,27.79 0 bottom
U$23  [CS#-<]]  33.55,37.31 90 top
U$24  [CS#-<]]  33.55,37.31 90 bottom
U$25  [SDA-[)]  77.22,11.05 90 top
U$26  [RX#MOSI2]  36.07,34.57 90 top
U$27  [SCL-[)]  79.76,11.05 90 top
U$28  [SDA-[)]  77.22,11.05 90 bottom
U$29  [SCL-[)]  79.76,11.05 90 bottom
U$30  [3V3-04]  74.68,11.05 90 top
U$31  [RX#MOSI3]  36.09,33.63 90 bottom
U$32  [3V3-04]  74.68,11.05 90 bottom
U$33  [GND-04]  72.14,11.05 90 top
U$34  [TX#MISO0]  38.63,34.39 90 top
U$35  [#RST3]  23.37,10.79 90 top
U$36  [#RST3]  23.37,10.79 90 bottom
U$37  [TX#MISO1]  38.63,33.43 90 bottom
U$38  [SCK-(]-04]  41.15,36.2 90 top
U$39  [#SAFE1]  25.91,10.79 90 top
U$40  [#SAFE1]  25.91,10.79 90 bottom
U$41  [SCK-(]-04]  41.15,36.2 90 bottom
U$42  [GND-04]  72.14,11.05 90 bottom
U$43  [PPS5]  20.83,11.05 90 top
U$44  [PPS5]  20.83,11.05 90 bottom
U$45  [I_SUPER2_C-()-03]  54.48,33.76 0 bottom
U$46  [INT8]  69.6,11.05 90 top
U$47  [INT8]  69.6,11.05 90 bottom
U$48  [U#BLOX3]  72.52,27.79 0 bottom
U$49  [#RST3]  64.52,10.79 90 top
U$50  [#RST3]  64.52,10.79 90 bottom
U$51  [#SAFE1]  67.06,10.79 90 top
U$52  [PPS0]  42.44,15.11 90 top
U$53  [#SAFE1]  67.06,10.79 90 bottom
U$54  [PPS5]  61.98,11.05 90 top
U$55  [PPS5]  61.98,11.05 90 bottom
U$56  [PPS0]  83.59,15.11 90 top
U$57  [3V3-04]  72.14,36.04 90 bottom
U$58  [3V3-04]  72.14,36.04 90 top
U$59  [GND-04]  67.06,35.92 90 bottom
U$60  [3V3-04]  30.99,36.04 90 bottom
U$61  [3V3-04]  30.99,36.04 90 top
U$62  [GND-04]  25.91,35.92 90 bottom
U$63  [GND-04]  25.91,35.92 90 top
U$64  [GND-04]  67.06,35.92 90 top
U$65  [PWR-()-03]  86.26,14.86 90 top
U$66  [5V]  69.6,37.06 90 top
U$67  [5V]  69.6,37.06 90 bottom
U$68  [CS#-<]]  74.7,37.31 90 top
U$69  [CS#-<]]  74.7,37.31 90 bottom
U$70  [SCK-(]-04]  82.3,36.2 90 top
U$71  [SCK-(]-04]  82.3,36.2 90 bottom
U$72  [RX#MOSI2]  77.22,34.57 90 top
U$73  [RX#MOSI3]  77.24,33.63 90 bottom
U$74  [TX#MISO0]  79.78,34.39 90 top
U$75  [TX#MISO1]  79.78,33.43 90 bottom
U$76  [NEO#M9N1]  75.69,25.4 0 bottom
U$77  [SPI1]  78.74,17.02 0 bottom
U$78  [QWIIC_4MM]  50.29,20.57 0 top
U$79  [PPS0]  87.88,19.05 0 bottom
U$80  [PWR1]  88.39,21.34 0 bottom
U$81  [ANT0]  85.55,29.62 90 top
U$82  [NEO_GPS_BOARD_SILK_FINAL#03#JPG]  63.25,20.83 0 bottom
U$83  [SDA-[)]  36.07,47.09 90 top
U$84  [SCL-[)]  38.61,47.09 90 top
U$85  [SDA-[)]  36.07,47.09 90 bottom
U$86  [SCL-[)]  38.61,47.09 90 bottom
U$87  [3V3-04]  33.53,47.09 90 top
U$88  [3V3-04]  33.53,47.09 90 bottom
U$89  [GND-04]  30.99,47.09 90 top
U$90  [GND-04]  30.99,47.09 90 bottom
U$91  [I_SUPER2_C-()-03]  13.34,69.8 0 bottom
U$92  [INT8]  28.45,47.09 90 top
U$93  [INT8]  28.45,47.09 90 bottom
U$94  [U#BLOX3]  31.37,63.83 0 bottom
U$95  [#RST3]  23.37,46.84 90 top
U$96  [#RST3]  23.37,46.84 90 bottom
U$97  [#SAFE1]  25.91,46.84 90 top
U$98  [#SAFE1]  25.91,46.84 90 bottom
U$99  [PPS5]  20.83,47.09 90 top
U$100  [PPS5]  20.83,47.09 90 bottom
U$101  [PPS0]  42.44,51.16 90 top
U$102  [3V3-04]  30.99,72.09 90 bottom
U$103  [3V3-04]  30.99,72.09 90 top
U$104  [GND-04]  25.91,71.96 90 bottom
U$105  [GND-04]  25.91,71.96 90 top
U$106  [PWR-()-03]  45.11,50.9 90 top
U$107  [5V]  28.45,73.1 90 top
U$108  [5V]  28.45,73.1 90 bottom
U$109  [CS#-<]]  33.55,73.36 90 top
U$110  [CS#-<]]  33.55,73.36 90 bottom
U$111  [SCK-(]-04]  41.15,72.24 90 top
U$112  [SCK-(]-04]  41.15,72.24 90 bottom
U$113  [RX#MOSI2]  36.07,70.61 90 top
U$114  [RX#MOSI3]  36.09,69.67 90 bottom
U$115  [TX#MISO0]  38.63,70.43 90 top
U$116  [TX#MISO1]  38.63,69.47 90 bottom
U$117  [NEO#M9N1]  34.54,61.44 0 bottom
U$118  [SPI1]  37.59,53.06 0 bottom
U$119  [QWIIC_4MM]  9.14,56.62 0 top
U$120  [PPS0]  46.74,55.09 0 bottom
U$121  [PWR1]  47.24,57.38 0 bottom
U$122  [ANT0]  44.4,65.66 90 top
U$123  [NEO_GPS_BOARD_SILK_FINAL#03#JPG]  22.1,56.87 0 bottom
U$124  [SDA-[)]  77.22,47.09 90 top
U$125  [SCL-[)]  79.76,47.09 90 top
U$126  [SDA-[)]  77.22,47.09 90 bottom
U$127  [SCL-[)]  79.76,47.09 90 bottom
U$128  [3V3-04]  74.68,47.09 90 top
U$129  [3V3-04]  74.68,47.09 90 bottom
U$130  [GND-04]  72.14,47.09 90 top
U$131  [GND-04]  72.14,47.09 90 bottom
U$132  [I_SUPER2_C-()-03]  54.48,69.8 0 bottom
U$133  [INT8]  69.6,47.09 90 top
U$134  [INT8]  69.6,47.09 90 bottom
U$135  [U#BLOX3]  72.52,63.83 0 bottom
U$136  [#RST3]  64.52,46.84 90 top
U$137  [#RST3]  64.52,46.84 90 bottom
U$138  [#SAFE1]  67.06,46.84 90 top
U$139  [#SAFE1]  67.06,46.84 90 bottom
U$140  [PPS5]  61.98,47.09 90 top
U$141  [PPS5]  61.98,47.09 90 bottom
U$142  [PPS0]  83.59,51.16 90 top
U$143  [3V3-04]  72.14,72.09 90 bottom
U$144  [3V3-04]  72.14,72.09 90 top
U$145  [GND-04]  67.06,71.96 90 bottom
U$146  [GND-04]  67.06,71.96 90 top
U$147  [PWR-()-03]  86.26,50.9 90 top
U$148  [5V]  69.6,73.1 90 top
U$149  [5V]  69.6,73.1 90 bottom
U$150  [CS#-<]]  74.7,73.36 90 top
U$151  [CS#-<]]  74.7,73.36 90 bottom
U$152  [SCK-(]-04]  82.3,72.24 90 top
U$153  [SCK-(]-04]  82.3,72.24 90 bottom
U$154  [RX#MOSI2]  77.22,70.61 90 top
U$155  [RX#MOSI3]  77.24,69.67 90 bottom
U$156  [TX#MISO0]  79.78,70.43 90 top
U$157  [TX#MISO1]  79.78,69.47 90 bottom
U$158  [NEO#M9N1]  75.69,61.44 0 bottom
U$159  [SPI1]  78.74,53.06 0 bottom
U$160  [QWIIC_4MM]  50.29,56.62 0 top
U$161  [PPS0]  87.88,55.09 0 bottom
U$162  [PWR1]  88.39,57.38 0 bottom
U$163  [ANT0]  85.55,65.66 90 top
U$164  [NEO_GPS_BOARD_SILK_FINAL#03#JPG]  63.25,56.87 0 bottom
U$165  [SDA-[)]  36.07,83.13 90 top
U$166  [SCL-[)]  38.61,83.13 90 top
U$167  [SDA-[)]  36.07,83.13 90 bottom
U$168  [SCL-[)]  38.61,83.13 90 bottom
U$169  [3V3-04]  33.53,83.13 90 top
U$170  [3V3-04]  33.53,83.13 90 bottom
U$171  [GND-04]  30.99,83.13 90 top
U$172  [GND-04]  30.99,83.13 90 bottom
U$173  [I_SUPER2_C-()-03]  13.34,105.84 0 bottom
U$174  [INT8]  28.45,83.13 90 top
U$175  [INT8]  28.45,83.13 90 bottom
U$176  [U#BLOX3]  31.37,99.87 0 bottom
U$177  [#RST3]  23.37,82.88 90 top
U$178  [#RST3]  23.37,82.88 90 bottom
U$179  [#SAFE1]  25.91,82.88 90 top
U$180  [#SAFE1]  25.91,82.88 90 bottom
U$181  [PPS5]  20.83,83.13 90 top
U$182  [PPS5]  20.83,83.13 90 bottom
U$183  [PPS0]  42.44,87.2 90 top
U$184  [3V3-04]  30.99,108.13 90 bottom
U$185  [3V3-04]  30.99,108.13 90 top
U$186  [GND-04]  25.91,108 90 bottom
U$187  [GND-04]  25.91,108 90 top
U$188  [PWR-()-03]  45.11,86.94 90 top
U$189  [5V]  28.45,109.14 90 top
U$190  [5V]  28.45,109.14 90 bottom
U$191  [CS#-<]]  33.55,109.4 90 top
U$192  [CS#-<]]  33.55,109.4 90 bottom
U$193  [SCK-(]-04]  41.15,108.28 90 top
U$194  [SCK-(]-04]  41.15,108.28 90 bottom
U$195  [RX#MOSI2]  36.07,106.65 90 top
U$196  [RX#MOSI3]  36.09,105.71 90 bottom
U$197  [TX#MISO0]  38.63,106.48 90 top
U$198  [TX#MISO1]  38.63,105.51 90 bottom
U$199  [NEO#M9N1]  34.54,97.49 0 bottom
U$200  [SPI1]  37.59,89.1 0 bottom
U$201  [QWIIC_4MM]  9.14,92.66 0 top
U$202  [PPS0]  46.74,91.14 0 bottom
U$203  [PWR1]  47.24,93.42 0 bottom
U$204  [ANT0]  44.4,101.7 90 top
U$205  [NEO_GPS_BOARD_SILK_FINAL#03#JPG]  22.1,92.91 0 bottom
U$206  [SDA-[)]  77.22,83.13 90 top
U$207  [SCL-[)]  79.76,83.13 90 top
U$208  [SDA-[)]  77.22,83.13 90 bottom
U$209  [SCL-[)]  79.76,83.13 90 bottom
U$210  [3V3-04]  74.68,83.13 90 top
U$211  [3V3-04]  74.68,83.13 90 bottom
U$212  [GND-04]  72.14,83.13 90 top
U$213  [GND-04]  72.14,83.13 90 bottom
U$214  [I_SUPER2_C-()-03]  54.48,105.84 0 bottom
U$215  [INT8]  69.6,83.13 90 top
U$216  [INT8]  69.6,83.13 90 bottom
U$217  [U#BLOX3]  72.52,99.87 0 bottom
U$218  [#RST3]  64.52,82.88 90 top
U$219  [#RST3]  64.52,82.88 90 bottom
U$220  [#SAFE1]  67.06,82.88 90 top
U$221  [#SAFE1]  67.06,82.88 90 bottom
U$222  [PPS5]  61.98,83.13 90 top
U$223  [PPS5]  61.98,83.13 90 bottom
U$224  [PPS0]  83.59,87.2 90 top
U$225  [3V3-04]  72.14,108.13 90 bottom
U$226  [3V3-04]  72.14,108.13 90 top
U$227  [GND-04]  67.06,108 90 bottom
U$228  [GND-04]  67.06,108 90 top
U$229  [PWR-()-03]  86.26,86.94 90 top
U$230  [5V]  69.6,109.14 90 top
U$231  [5V]  69.6,109.14 90 bottom
U$232  [CS#-<]]  74.7,109.4 90 top
U$233  [CS#-<]]  74.7,109.4 90 bottom
U$234  [SCK-(]-04]  82.3,108.28 90 top
U$235  [SCK-(]-04]  82.3,108.28 90 bottom
U$236  [RX#MOSI2]  77.22,106.65 90 top
U$237  [RX#MOSI3]  77.24,105.71 90 bottom
U$238  [TX#MISO0]  79.78,106.48 90 top
U$239  [TX#MISO1]  79.78,105.51 90 bottom
U$240  [NEO#M9N1]  75.69,97.49 0 bottom
U$241  [SPI1]  78.74,89.1 0 bottom
U$242  [QWIIC_4MM]  50.29,92.66 0 top
U$243  [PPS0]  87.88,91.14 0 bottom
U$244  [PWR1]  88.39,93.42 0 bottom
U$245  [ANT0]  85.55,101.7 90 top
U$246  [NEO_GPS_BOARD_SILK_FINAL#03#JPG]  63.25,92.91 0 bottom
U$247  [SDA-[)]  36.07,119.18 90 top
U$248  [SCL-[)]  38.61,119.18 90 top
U$249  [SDA-[)]  36.07,119.18 90 bottom
U$250  [SCL-[)]  38.61,119.18 90 bottom
U$251  [3V3-04]  33.53,119.18 90 top
U$252  [3V3-04]  33.53,119.18 90 bottom
U$253  [GND-04]  30.99,119.18 90 top
U$254  [GND-04]  30.99,119.18 90 bottom
U$255  [I_SUPER2_C-()-03]  13.34,141.88 0 bottom
U$256  [INT8]  28.45,119.18 90 top
U$257  [INT8]  28.45,119.18 90 bottom
U$258  [U#BLOX3]  31.37,135.92 0 bottom
U$259  [#RST3]  23.37,118.92 90 top
U$260  [#RST3]  23.37,118.92 90 bottom
U$261  [#SAFE1]  25.91,118.92 90 top
U$262  [#SAFE1]  25.91,118.92 90 bottom
U$263  [PPS5]  20.83,119.18 90 top
U$264  [PPS5]  20.83,119.18 90 bottom
U$265  [PPS0]  42.44,123.24 90 top
U$266  [3V3-04]  30.99,144.17 90 bottom
U$267  [3V3-04]  30.99,144.17 90 top
U$268  [GND-04]  25.91,144.04 90 bottom
U$269  [GND-04]  25.91,144.04 90 top
U$270  [PWR-()-03]  45.11,122.99 90 top
U$271  [5V]  28.45,145.19 90 top
U$272  [5V]  28.45,145.19 90 bottom
U$273  [CS#-<]]  33.55,145.44 90 top
U$274  [CS#-<]]  33.55,145.44 90 bottom
U$275  [SCK-(]-04]  41.15,144.32 90 top
U$276  [SCK-(]-04]  41.15,144.32 90 bottom
U$277  [RX#MOSI2]  36.07,142.7 90 top
U$278  [RX#MOSI3]  36.09,141.76 90 bottom
U$279  [TX#MISO0]  38.63,142.52 90 top
U$280  [TX#MISO1]  38.63,141.55 90 bottom
U$281  [NEO#M9N1]  34.54,133.53 0 bottom
U$282  [SPI1]  37.59,125.15 0 bottom
U$283  [QWIIC_4MM]  9.14,128.7 0 top
U$284  [PPS0]  46.74,127.18 0 bottom
U$285  [PWR1]  47.24,129.46 0 bottom
U$286  [ANT0]  44.4,137.74 90 top
U$287  [NEO_GPS_BOARD_SILK_FINAL#03#JPG]  22.1,128.96 0 bottom
U$288  [SDA-[)]  77.22,119.18 90 top
U$289  [SCL-[)]  79.76,119.18 90 top
U$290  [SDA-[)]  77.22,119.18 90 bottom
U$291  [SCL-[)]  79.76,119.18 90 bottom
U$292  [3V3-04]  74.68,119.18 90 top
U$293  [3V3-04]  74.68,119.18 90 bottom
U$294  [GND-04]  72.14,119.18 90 top
U$295  [GND-04]  72.14,119.18 90 bottom
U$296  [I_SUPER2_C-()-03]  54.48,141.88 0 bottom
U$297  [INT8]  69.6,119.18 90 top
U$298  [INT8]  69.6,119.18 90 bottom
U$299  [U#BLOX3]  72.52,135.92 0 bottom
U$300  [#RST3]  64.52,118.92 90 top
U$301  [#RST3]  64.52,118.92 90 bottom
U$302  [#SAFE1]  67.06,118.92 90 top
U$303  [#SAFE1]  67.06,118.92 90 bottom
U$304  [PPS5]  61.98,119.18 90 top
U$305  [PPS5]  61.98,119.18 90 bottom
U$306  [PPS0]  83.59,123.24 90 top
U$307  [3V3-04]  72.14,144.17 90 bottom
U$308  [3V3-04]  72.14,144.17 90 top
U$309  [GND-04]  67.06,144.04 90 bottom
U$310  [GND-04]  67.06,144.04 90 top
U$311  [PWR-()-03]  86.26,122.99 90 top
U$312  [5V]  69.6,145.19 90 top
U$313  [5V]  69.6,145.19 90 bottom
U$314  [CS#-<]]  74.7,145.44 90 top
U$315  [CS#-<]]  74.7,145.44 90 bottom
U$316  [SCK-(]-04]  82.3,144.32 90 top
U$317  [SCK-(]-04]  82.3,144.32 90 bottom
U$318  [RX#MOSI2]  77.22,142.7 90 top
U$319  [RX#MOSI3]  77.24,141.76 90 bottom
U$320  [TX#MISO0]  79.78,142.52 90 top
U$321  [TX#MISO1]  79.78,141.55 90 bottom
U$322  [NEO#M9N1]  75.69,133.53 0 bottom
U$323  [SPI1]  78.74,125.15 0 bottom
U$324  [QWIIC_4MM]  50.29,128.7 0 top
U$325  [PPS0]  87.88,127.18 0 bottom
U$326  [PWR1]  88.39,129.46 0 bottom
U$327  [ANT0]  85.55,137.74 90 top
U$328  [NEO_GPS_BOARD_SILK_FINAL#03#JPG]  63.25,128.96 0 bottom
Y1  GPS_CHIP_ANTENNAW3011  [W3011]  46.23,31.5 90 top
Y2  GPS_CHIP_ANTENNAW3011  [W3011]  87.38,31.5 90 top
Y3  GPS_CHIP_ANTENNAW3011  [W3011]  46.23,67.54 90 top
Y4  GPS_CHIP_ANTENNAW3011  [W3011]  87.38,67.54 90 top
Y5  GPS_CHIP_ANTENNAW3011  [W3011]  46.23,103.58 90 top
Y6  GPS_CHIP_ANTENNAW3011  [W3011]  87.38,103.58 90 top
Y7  GPS_CHIP_ANTENNAW3011  [W3011]  46.23,139.62 90 top
Y8  GPS_CHIP_ANTENNAW3011  [W3011]  87.38,139.62 90 top

## Library data of the parts
B1-B8 = SparkFun-Batteries; PROD_ID: BATT-14267
C1-C4 C6 C8-C10 C12-C14 C16-C18 C20-C22 C24-C26 C28-C30 C32 = SparkFun-Capacitors; PROD_ID: CAP-00868
C5 C7 C11 C15 C19 C23 C27 C31 = SparkFun-Capacitors; PROD_ID: CAP-00810
D1 D2 D5 D7 D9 D11 D13 D15 = SparkFun-DiscreteSemi; PROD_ID: DIO-10955
D3 D4 D6 D8 D10 D12 D14 D16 = SparkFun-IC-Power; PROD_ID: DIO-14084
E$1 E$2 LOGO1-LOGO16 U$14 U$78 U$119 U$160 U$201 U$242 U$283 U$324 = SparkFun-Aesthetics
E$3 = SparkFun-Retired
J1 J8 J13 J18 J23 J28 J33 J38 = SparkFun-Connectors
J2 J4 J6 J7 J11 J12 J16 J17 J21 J22 J26 J27 J31 J32 J36 J37 = SparkFun-Connectors; PROD_ID: CONN-13694
J3 J10 J15 J20 J25 J30 J35 J40 = SparkFun-Connectors; PROD_ID: CONN-14122
J5 J9 J14 J19 J24 J29 J34 J39 JP11 JP15 JP23 JP34 JP45 JP55 JP66 JP77 = SparkFun-Connectors; PROD_ID: CONN-09696
JP1-JP4 JP7-JP10 JP12-JP14 JP16 JP18-JP22 JP24-JP27 JP29-JP33 JP35-JP38 JP40-JP44 JP46-JP49 JP51-JP54 JP56-JP59 JP61-JP65 JP67-JP71 JP73-JP76 JP81 JP91 JP101 = SparkFun
JP5 JP6 JP17 JP28 JP39 JP50 JP60 JP72 PPS PPS1-PPS7 PWR\ PWR\1-PWR\7 SPI SPI1-SPI7 = SparkFun-Jumpers
LED1 LED3 LED5 LED7 LED9 LED11 LED13 LED15 = SparkFun-LED; PROD_ID: DIO-08575
LED2 LED4 LED6 LED8 LED10 LED12 LED14 LED16 = SparkFun-LED; PROD_ID: DIO-00819
R1 R5 R11 R20 R21 R24 R35 R36 R39 R50 R51 R54 R65 R66 R69 R80 R81 R84 R95 R96 R99 R110 R111 R114 = SparkFun-Resistors; PROD_ID: RES-07856
R2-R4 R6 R14 R17 R22 R23 R31 R32 R37 R38 R46 R47 R52 R53 R61 R62 R67 R68 R76 R77 R82 R83 R91 R92 R97 R98 R106 R107 R112 R113 = SparkFun-Resistors; PROD_ID: RES-08270
R7 R8 R18 R19 R33 R34 R48 R49 R63 R64 R78 R79 R93 R94 R108 R109 = SparkFun-Resistors; PROD_ID: RES-08272
R9 R10 R25 R26 R40 R41 R55 R56 R70 R71 R85 R86 R100 R101 R115 R116 = SparkFun-Resistors; PROD_ID: RES-09334
R12 R13 R28 R29 R43 R44 R58 R59 R73 R74 R88 R89 R103 R104 R118 R119 = SparkFun-Resistors; PROD_ID: RES-12083
R15 R27 R42 R57 R72 R87 R102 R117 = SparkFun-Resistors; PROD_ID: RES-07828
R16 R30 R45 R60 R75 R90 R105 R120 = SparkFun-Resistors; PROD_ID: RES-14241
U1 U4 U6 U8 U10 U12 U14 U16 = gps; PROD_ID: IC-14651
U2 U3 U5 U7 U9 U11 U13 U15 = SparkFun-IC-Power; PROD_ID: VREG-12457
U$1 U$3-U$10 U$18-U$20 U$23-U$25 U$27-U$30 U$32 U$33 U$38 U$41 U$42 U$45 U$57-U$71 U$83-U$91 U$102-U$112 U$124-U$132 U$143-U$153 U$165-U$173 U$184-U$194 U$206-U$214 U$225-U$235 U$247-U$255 U$266-U$276 U$288-U$296 U$307-U$317 = Labels
U$2 U$11 U$76 U$77 U$117 U$118 U$158 U$159 U$199 U$200 U$240 U$241 U$281 U$282 U$322 U$323 = board lables
U$12 U$17 U$79 U$80 U$120 U$121 U$161 U$162 U$202 U$203 U$243 U$244 U$284 U$285 U$325 U$326 = LEDs
U$13 U$81 U$122 U$163 U$204 U$245 U$286 U$327 = ANT
U$15 U$16 U$22 U$46-U$48 U$92-U$94 U$133-U$135 U$174-U$176 U$215-U$217 U$256-U$258 U$297-U$299 = buzzard_labels (5)
U$21 U$82 U$123 U$164 U$205 U$246 U$287 U$328 = NEO_GPS_board_silk_FINAL#03#jpg
U$26 U$31 U$34 U$37 U$72-U$75 U$113-U$116 U$154-U$157 U$195-U$198 U$236-U$239 U$277-U$280 U$318-U$321 = buzzard_labels (36)
U$35 U$36 U$39 U$40 U$43 U$44 U$49-U$51 U$53-U$55 U$95-U$100 U$136-U$141 U$177-U$182 U$218-U$223 U$259-U$264 U$300-U$305 = buzzard_labels (7)
U$52 U$56 U$101 U$142 U$183 U$224 U$265 U$306 = buzzard_labels (33)
Y1-Y8 = SparkFun-GPS; PROD_ID: ANT-14304

## Nets
3.3V [3.3V]: C4.1 C5.2 D2.A J1.3 J2.2 J4.2 J5.2 JP5.2 PWR\.2 R15.2 R16.2 U1.7 U1.23 U2.5
3.3V1 [3.3V]: C2.1 C7.2 D1.A J6.2 J7.2 J8.3 J9.2 JP6.2 PWR\1.2 R27.2 R30.2 U3.5 U4.7 U4.23
3.3V2 [3.3V]: C10.1 C11.2 D5.A J11.2 J12.2 J13.3 J14.2 JP17.2 PWR\2.2 R42.2 R45.2 U5.5 U6.7 U6.23
3.3V3 [3.3V]: C14.1 C15.2 D7.A J16.2 J17.2 J18.3 J19.2 JP28.2 PWR\3.2 R57.2 R60.2 U7.5 U8.7 U8.23
3.3V4 [3.3V]: C18.1 C19.2 D9.A J21.2 J22.2 J23.3 J24.2 JP39.2 PWR\4.2 R72.2 R75.2 U9.5 U10.7 U10.23
3.3V5 [3.3V]: C22.1 C23.2 D11.A J26.2 J27.2 J28.3 J29.2 JP50.2 PWR\5.2 R87.2 R90.2 U11.5 U12.7 U12.23
3.3V6 [3.3V]: C26.1 C27.2 D13.A J31.2 J32.2 J33.3 J34.2 JP60.2 PWR\6.2 R102.2 R105.2 U13.5 U14.7 U14.23
3.3V7 [3.3V]: C30.1 C31.2 D15.A J36.2 J37.2 J38.3 J39.2 JP72.2 PWR\7.2 R117.2 R120.2 U15.5 U16.7 U16.23
5V: C6.1 D3.5 J1.2 J3.VBUS1 J3.VBUS2 U2.1 U2.3
5V1: C8.1 D4.5 J8.2 J10.VBUS1 J10.VBUS2 U3.1 U3.3
5V2: C12.1 D6.5 J13.2 J15.VBUS1 J15.VBUS2 U5.1 U5.3
5V3: C16.1 D8.5 J18.2 J20.VBUS1 J20.VBUS2 U7.1 U7.3
5V4: C20.1 D10.5 J23.2 J25.VBUS1 J25.VBUS2 U9.1 U9.3
5V5: C24.1 D12.5 J28.2 J30.VBUS1 J30.VBUS2 U11.1 U11.3
5V6: C28.1 D14.5 J33.2 J35.VBUS1 J35.VBUS2 U13.1 U13.3
5V7: C32.1 D16.5 J38.2 J40.VBUS1 J40.VBUS2 U15.1 U15.3
!RESET: JP15.3 U1.8
!RESET1: JP11.3 U4.8
!RESET2: JP23.3 U6.8
!RESET3: JP34.3 U8.8
!RESET4: JP45.3 U10.8
!RESET5: JP55.3 U12.8
!RESET6: JP66.3 U14.8
!RESET7: JP77.3 U16.8
!SAFE: JP15.2 U1.1
!SAFE1: JP11.2 U4.1
!SAFE2: JP23.2 U6.1
!SAFE3: JP34.2 U8.1
!SAFE4: JP45.2 U10.1
!SAFE5: JP55.2 U12.1
!SAFE6: JP66.2 U14.1
!SAFE7: JP77.2 U16.1
BACKUP: B1.+ C3.1 R5.1 U1.22
BACKUP1: B2.+ C1.1 R20.1 U4.22
BACKUP2: B3.+ C9.1 R35.1 U6.22
BACKUP3: B4.+ C13.1 R50.1 U8.22
BACKUP4: B5.+ C17.1 R65.1 U10.22
BACKUP5: B6.+ C21.1 R80.1 U12.22
BACKUP6: B7.+ C25.1 R95.1 U14.22
BACKUP7: B8.+ C29.1 R110.1 U16.22
D+: D3.4 R9.1
D+1: D4.4 R25.1
D+2: D6.4 R40.1
D+3: D8.4 R55.1
D+4: D10.4 R70.1
D+5: D12.4 R85.1
D+6: D14.4 R100.1
D+7: D16.4 R115.1
D-: D3.6 R10.1
D-1: D4.6 R26.1
D-2: D6.6 R41.1
D-3: D8.6 R56.1
D-4: D10.6 R71.1
D-5: D12.6 R86.1
D-6: D14.6 R101.1
D-7: D16.6 R116.1
D_SEL: R16.1 SPI.2 U1.2
D_SEL1: R30.1 SPI1.2 U4.2
D_SEL2: R45.1 SPI2.2 U6.2
D_SEL3: R60.1 SPI3.2 U8.2
D_SEL4: R75.1 SPI4.2 U10.2
D_SEL5: R90.1 SPI5.2 U12.2
D_SEL6: R105.1 SPI6.2 U14.2
D_SEL7: R120.1 SPI7.2 U16.2
GND: B1.- C3.2 C4.2 C5.1 C6.2 D3.2 J1.1 J2.1 J3.GND J3.GND2 J4.1 J5.1 LED1.C LED2.C R12.1 R13.1 R15.1 SPI.1 U1.10 U1.12 U1.13 U1.24 U2.2 Y1.2 Y1.3
GND1: B2.- C1.2 C2.2 C7.1 C8.2 D4.2 J6.1 J7.1 J8.1 J9.1 J10.GND J10.GND2 LED3.C LED4.C R27.1 R28.1 R29.1 SPI1.1 U3.2 U4.10 U4.12 U4.13 U4.24 Y2.2 Y2.3
GND2: B3.- C9.2 C10.2 C11.1 C12.2 D6.2 J11.1 J12.1 J13.1 J14.1 J15.GND J15.GND2 LED5.C LED6.C R42.1 R43.1 R44.1 SPI2.1 U5.2 U6.10 U6.12 U6.13 U6.24 Y3.2 Y3.3
GND3: B4.- C13.2 C14.2 C15.1 C16.2 D8.2 J16.1 J17.1 J18.1 J19.1 J20.GND J20.GND2 LED7.C LED8.C R57.1 R58.1 R59.1 SPI3.1 U7.2 U8.10 U8.12 U8.13 U8.24 Y4.2 Y4.3
GND4: B5.- C17.2 C18.2 C19.1 C20.2 D10.2 J21.1 J22.1 J23.1 J24.1 J25.GND J25.GND2 LED9.C LED10.C R72.1 R73.1 R74.1 SPI4.1 U9.2 U10.10 U10.12 U10.13 U10.24 Y5.2 Y5.3
GND5: B6.- C21.2 C22.2 C23.1 C24.2 D12.2 J26.1 J27.1 J28.1 J29.1 J30.GND J30.GND2 LED11.C LED12.C R87.1 R88.1 R89.1 SPI5.1 U11.2 U12.10 U12.12 U12.13 U12.24 Y6.2 Y6.3
GND6: B7.- C25.2 C26.2 C27.1 C28.2 D14.2 J31.1 J32.1 J33.1 J34.1 J35.GND J35.GND2 LED13.C LED14.C R102.1 R103.1 R104.1 SPI6.1 U13.2 U14.10 U14.12 U14.13 U14.24 Y7.2 Y7.3
GND7: B8.- C29.2 C30.2 C31.1 C32.2 D16.2 J36.1 J37.1 J38.1 J39.1 J40.GND J40.GND2 LED15.C LED16.C R117.1 R118.1 R119.1 SPI7.1 U15.2 U16.10 U16.12 U16.13 U16.24 Y8.2 Y8.3
GPS_ANT1 [Antenna]: U1.11 Y1.1
GPS_ANT2 [Antenna]: U4.11 Y2.1
GPS_ANT3 [Antenna]: U6.11 Y3.1
GPS_ANT4 [Antenna]: U8.11 Y4.1
GPS_ANT5 [Antenna]: U10.11 Y5.1
GPS_ANT6 [Antenna]: U12.11 Y6.1
GPS_ANT7 [Antenna]: U14.11 Y7.1
GPS_ANT8 [Antenna]: U16.11 Y8.1
INT: JP15.1 U1.4
INT1: JP11.1 U4.4
INT2: JP23.1 U6.4
INT3: JP34.1 U8.4
INT4: JP45.1 U10.4
INT5: JP55.1 U12.4
INT6: JP66.1 U14.4
INT7: JP77.1 U16.4
N$1: PWR\.1 R1.2
N$2: LED1.A R11.1
N$3: JP6.1 R19.2
N$4: PPS.1 R11.2
N$5: JP5.1 R8.2
N$6: D2.C R5.2
N$7: J3.B5 R12.2
N$8: JP5.3 R7.2
N$9: J3.A5 R13.2
N$10: LED2.A R1.1
N$11: R9.2 U1.6
N$12: R10.2 U1.5
N$13: JP6.3 R18.2
N$14: LED3.A R21.1
N$15: PPS1.1 R21.2
N$16: D1.C R20.2
N$17: LED4.A R24.1
N$18: R25.2 U4.6
N$19: R26.2 U4.5
N$20: PWR\1.1 R24.2
N$21: J10.B5 R28.2
N$22: J10.A5 R29.2
N$23: JP17.1 R34.2
N$24: JP17.3 R33.2
N$25: LED5.A R36.1
N$26: PPS2.1 R36.2
N$27: D5.C R35.2
N$28: LED6.A R39.1
N$29: R40.2 U6.6
N$30: R41.2 U6.5
N$31: PWR\2.1 R39.2
N$32: J15.B5 R43.2
N$33: J15.A5 R44.2
N$34: JP28.1 R49.2
N$35: JP28.3 R48.2
N$36: LED7.A R51.1
N$37: PPS3.1 R51.2
N$38: D7.C R50.2
N$39: LED8.A R54.1
N$40: R55.2 U8.6
N$41: R56.2 U8.5
N$42: PWR\3.1 R54.2
N$43: J20.B5 R58.2
N$44: J20.A5 R59.2
N$45: JP39.1 R64.2
N$46: JP39.3 R63.2
N$47: LED9.A R66.1
N$48: PPS4.1 R66.2
N$49: D9.C R65.2
N$50: LED10.A R69.1
N$51: R70.2 U10.6
N$52: R71.2 U10.5
N$53: PWR\4.1 R69.2
N$54: J25.B5 R73.2
N$55: J25.A5 R74.2
N$56: JP50.1 R79.2
N$57: JP50.3 R78.2
N$58: LED11.A R81.1
N$59: PPS5.1 R81.2
N$60: D11.C R80.2
N$61: LED12.A R84.1
N$62: R85.2 U12.6
N$63: R86.2 U12.5
N$64: PWR\5.1 R84.2
N$65: J30.B5 R88.2
N$66: J30.A5 R89.2
N$67: JP60.1 R94.2
N$68: JP60.3 R93.2
N$69: LED13.A R96.1
N$70: PPS6.1 R96.2
N$71: D13.C R95.2
N$72: LED14.A R99.1
N$73: R100.2 U14.6
N$74: R101.2 U14.5
N$75: PWR\6.1 R99.2
N$76: J35.B5 R103.2
N$77: J35.A5 R104.2
N$78: JP72.1 R109.2
N$79: JP72.3 R108.2
N$80: LED15.A R111.1
N$81: PPS7.1 R111.2
N$82: D15.C R110.2
N$83: LED16.A R114.1
N$84: R115.2 U16.6
N$85: R116.2 U16.5
N$86: PWR\7.1 R114.2
N$87: J40.B5 R118.2
N$88: J40.A5 R119.2
PPS: JP15.4 PPS.2 U1.3
PPS1: JP11.4 PPS1.2 U4.3
PPS2: JP23.4 PPS2.2 U6.3
PPS3: JP34.4 PPS3.2 U8.3
PPS4: JP45.4 PPS4.2 U10.3
PPS5: JP55.4 PPS5.2 U12.3
PPS6: JP66.4 PPS6.2 U14.3
PPS7: JP77.4 PPS7.2 U16.3
RXI/MOSI: J1.5 R6.2
RXI/MOSI1: J8.5 R17.2
RXI/MOSI2: J13.5 R32.2
RXI/MOSI3: J18.5 R47.2
RXI/MOSI4: J23.5 R62.2
RXI/MOSI5: J28.5 R77.2
RXI/MOSI6: J33.5 R92.2
RXI/MOSI7: J38.5 R107.2
RXLV: R6.1 U1.21
RXLV1: R17.1 U4.21
RXLV2: R32.1 U6.21
RXLV3: R47.1 U8.21
RXLV4: R62.1 U10.21
RXLV5: R77.1 U12.21
RXLV6: R92.1 U14.21
RXLV7: R107.1 U16.21
SCL/SCK: J1.7 J2.4 J4.4 J5.4 R4.2 R7.1
SCL/SCK1: J6.4 J7.4 J8.7 J9.4 R18.1 R23.2
SCL/SCK2: J11.4 J12.4 J13.7 J14.4 R33.1 R38.2
SCL/SCK3: J16.4 J17.4 J18.7 J19.4 R48.1 R53.2
SCL/SCK4: J21.4 J22.4 J23.7 J24.4 R63.1 R68.2
SCL/SCK5: J26.4 J27.4 J28.7 J29.4 R78.1 R83.2
SCL/SCK6: J31.4 J32.4 J33.7 J34.4 R93.1 R98.2
SCL/SCK7: J36.4 J37.4 J38.7 J39.4 R108.1 R113.2
SCL_LV: R4.1 U1.19
SCL_LV1: R23.1 U4.19
SCL_LV2: R38.1 U6.19
SCL_LV3: R53.1 U8.19
SCL_LV4: R68.1 U10.19
SCL_LV5: R83.1 U12.19
SCL_LV6: R98.1 U14.19
SCL_LV7: R113.1 U16.19
SDA/!CS: J1.4 J2.3 J4.3 J5.3 R2.2 R8.1
SDA/!CS1: J6.3 J7.3 J8.4 J9.3 R19.1 R22.2
SDA/!CS2: J11.3 J12.3 J13.4 J14.3 R34.1 R37.2
SDA/!CS3: J16.3 J17.3 J18.4 J19.3 R49.1 R52.2
SDA/!CS4: J21.3 J22.3 J23.4 J24.3 R64.1 R67.2
SDA/!CS5: J26.3 J27.3 J28.4 J29.3 R79.1 R82.2
SDA/!CS6: J31.3 J32.3 J33.4 J34.3 R94.1 R97.2
SDA/!CS7: J36.3 J37.3 J38.4 J39.3 R109.1 R112.2
SDA_LV: R2.1 U1.18
SDA_LV1: R22.1 U4.18
SDA_LV2: R37.1 U6.18
SDA_LV3: R52.1 U8.18
SDA_LV4: R67.1 U10.18
SDA_LV5: R82.1 U12.18
SDA_LV6: R97.1 U14.18
SDA_LV7: R112.1 U16.18
SHLD: J3.SHLD1 J3.SHLD2 J3.SHLD3 J3.SHLD4 J3.SHLD5 J3.SHLD6 J3.SHLD7 J3.SHLD8
SHLD1: J10.SHLD1 J10.SHLD2 J10.SHLD3 J10.SHLD4 J10.SHLD5 J10.SHLD6 J10.SHLD7 J10.SHLD8
SHLD2: J15.SHLD1 J15.SHLD2 J15.SHLD3 J15.SHLD4 J15.SHLD5 J15.SHLD6 J15.SHLD7 J15.SHLD8
SHLD3: J20.SHLD1 J20.SHLD2 J20.SHLD3 J20.SHLD4 J20.SHLD5 J20.SHLD6 J20.SHLD7 J20.SHLD8
SHLD4: J25.SHLD1 J25.SHLD2 J25.SHLD3 J25.SHLD4 J25.SHLD5 J25.SHLD6 J25.SHLD7 J25.SHLD8
SHLD5: J30.SHLD1 J30.SHLD2 J30.SHLD3 J30.SHLD4 J30.SHLD5 J30.SHLD6 J30.SHLD7 J30.SHLD8
SHLD6: J35.SHLD1 J35.SHLD2 J35.SHLD3 J35.SHLD4 J35.SHLD5 J35.SHLD6 J35.SHLD7 J35.SHLD8
SHLD7: J40.SHLD1 J40.SHLD2 J40.SHLD3 J40.SHLD4 J40.SHLD5 J40.SHLD6 J40.SHLD7 J40.SHLD8
TXLV: R3.1 U1.20
TXLV1: R14.1 U4.20
TXLV2: R31.1 U6.20
TXLV3: R46.1 U8.20
TXLV4: R61.1 U10.20
TXLV5: R76.1 U12.20
TXLV6: R91.1 U14.20
TXLV7: R106.1 U16.20
TXO/MISO: J1.6 R3.2
TXO/MISO1: J8.6 R14.2
TXO/MISO2: J13.6 R31.2
TXO/MISO3: J18.6 R46.2
TXO/MISO4: J23.6 R61.2
TXO/MISO5: J28.6 R76.2
TXO/MISO6: J33.6 R91.2
TXO/MISO7: J38.6 R106.2
USB_D+: D3.3 J3.A6 J3.B6
USB_D+1: D4.3 J10.A6 J10.B6
USB_D+2: D6.3 J15.A6 J15.B6
USB_D+3: D8.3 J20.A6 J20.B6
USB_D+4: D10.3 J25.A6 J25.B6
USB_D+5: D12.3 J30.A6 J30.B6
USB_D+6: D14.3 J35.A6 J35.B6
USB_D+7: D16.3 J40.A6 J40.B6
USB_D-: D3.1 J3.A7 J3.B7
USB_D-1: D4.1 J10.A7 J10.B7
USB_D-2: D6.1 J15.A7 J15.B7
USB_D-3: D8.1 J20.A7 J20.B7
USB_D-4: D10.1 J25.A7 J25.B7
USB_D-5: D12.1 J30.A7 J30.B7
USB_D-6: D14.1 J35.A7 J35.B7
USB_D-7: D16.1 J40.A7 J40.B7
VCC_RF: U1.9
VCC_RF1: U4.9
VCC_RF2: U6.9
VCC_RF3: U8.9
VCC_RF4: U10.9
VCC_RF5: U12.9
VCC_RF6: U14.9
VCC_RF7: U16.9

## Tracks (layer width: path | path; a pad name or v marks a point on that pad's centre or on a via)
3.3V  (via drill 0.3, 0.51)
  Top 0.152: v40.39,21.34 40,20.95 v39.06,20.95
  Top 0.508: U2.5 36.52,24.4 C4.1 34.42,25.23 U1.7 | v36.58,24.99 36.62,24.95 U2.5 | J4.2 43.19,24.49 43.69,24.99 v43.69,25.12 | v37.34,22.55 37.34,22.84 36.62,23.55 U2.5 | 32.82,13.26 31.88,14.2 20.83,14.2 19.56,15.47 19.56,16.1 | 32.82,13.26 33.53,12.55 J5.2 | 19.56,17.5 19.56,19.28 20.01,19.73 U1.23 | v14.73,16.23 14.86,16.1 19.56,16.1 | D2.A 19.56,17.5 | R15.2 23.82,36.47 v24,36.3 | 32.82,13.26 33.1,13.54 35.61,13.54 v35.64,13.56 | 19.56,16.1 C5.2 | 19.56,17.5 19.56,16.1 | R16.2 36.7,19.11 v36.7,17.88 | J2.2 12.57,25.49 v13.21,26.13
  Bottom 0.152: PWR\.2 40.41,21.31 v40.39,21.34 | v39.06,20.95 37.59,20.95 37.46,21.08
  Bottom 0.508: v43.69,25.12 43.56,24.99 v36.58,24.99 | v14.73,16.23 13.21,17.75 v13.21,26.13 11.94,27.4 11.94,29.97 | J1.3 30.99,37.08 30.2,36.3 v24,36.3 22.84,36.3 22.23,35.69 18.54,35.69 12.83,29.97 11.94,29.97 | v37.34,22.55 37.46,22.43 37.46,21.08 37.46,18.64 v36.7,17.88 36.7,14.61 35.66,13.56 v35.64,13.56 | JP5.2 11.94,29.97
3.3V1  (via drill 0.3, 0.51)
  Top 0.152: v81.53,21.34 81.15,20.95 v80.21,20.95
  Top 0.508: U3.5 77.67,24.4 C2.1 75.57,25.23 U4.7 | v77.72,24.99 77.77,24.95 U3.5 | J7.2 84.34,24.49 84.84,24.99 v84.84,25.12 | v78.49,22.55 78.49,22.84 77.77,23.55 U3.5 | 73.97,13.26 73.03,14.2 61.98,14.2 60.71,15.47 60.71,16.1 | 73.97,13.26 74.68,12.55 J9.2 | 60.71,17.5 60.71,19.28 61.16,19.73 U4.23 | v55.88,16.23 56.01,16.1 60.71,16.1 | D1.A 60.71,17.5 | R27.2 64.97,36.47 v65.15,36.3 | 73.97,13.26 74.24,13.54 76.76,13.54 v76.78,13.56 | 60.71,16.1 C7.2 | 60.71,17.5 60.71,16.1 | R30.2 77.85,19.11 v77.85,17.88 | J6.2 53.72,25.49 v54.36,26.13
  Bottom 0.152: PWR\1.2 81.56,21.31 v81.53,21.34 | v80.21,20.95 78.74,20.95 78.61,21.08
  Bottom 0.508: v84.84,25.12 84.71,24.99 v77.72,24.99 | v55.88,16.23 54.36,17.75 v54.36,26.13 53.09,27.4 53.09,29.97 | J8.3 72.14,37.08 71.35,36.3 v65.15,36.3 63.98,36.3 63.37,35.69 59.69,35.69 53.98,29.97 53.09,29.97 | v78.49,22.55 78.61,22.43 78.61,21.08 78.61,18.64 v77.85,17.88 77.85,14.61 76.81,13.56 v76.78,13.56 | JP6.2 53.09,29.97
3.3V2  (via drill 0.3, 0.51)
  Top 0.152: v40.39,57.38 40,57 v39.06,57
  Top 0.508: U5.5 36.52,60.44 C10.1 34.42,61.27 U6.7 | v36.58,61.04 36.62,60.99 U5.5 | J12.2 43.19,60.54 43.69,61.04 v43.69,61.16 | v37.34,58.6 37.34,58.88 36.62,59.59 U5.5 | 32.82,49.3 31.88,50.24 20.83,50.24 19.56,51.51 19.56,52.15 | 32.82,49.3 33.53,48.59 J14.2 | 19.56,53.54 19.56,55.32 20.01,55.77 U6.23 | v14.73,52.27 14.86,52.15 19.56,52.15 | D5.A 19.56,53.54 | R42.2 23.82,72.52 v24,72.34 | 32.82,49.3 33.1,49.58 35.61,49.58 v35.64,49.61 | 19.56,52.15 C11.2 | 19.56,53.54 19.56,52.15 | R45.2 36.7,55.15 v36.7,53.92 | J11.2 12.57,61.54 v13.21,62.17
  Bottom 0.152: PWR\2.2 40.41,57.35 v40.39,57.38 | v39.06,57 37.59,57 37.46,57.12